# EAGLE board piezo-preamp-tickler_V0-9a (EAGLE 7.5.0)
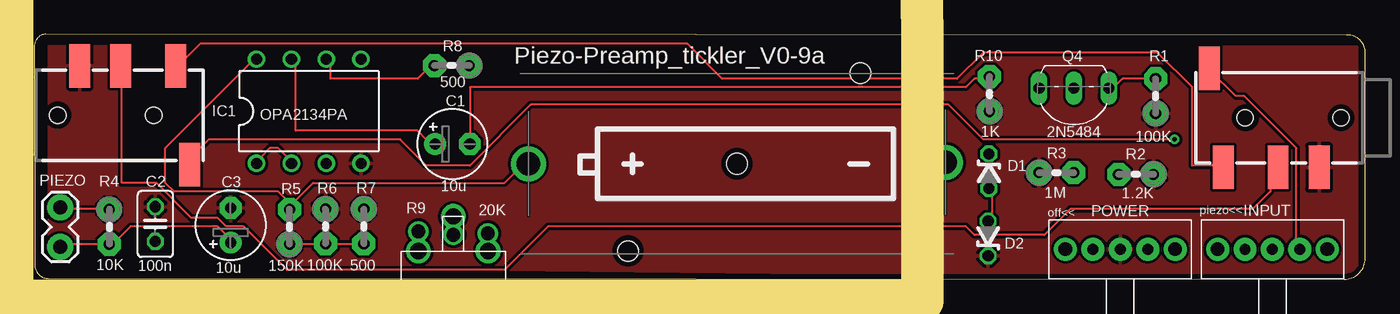
[diagram p0: board, top side]
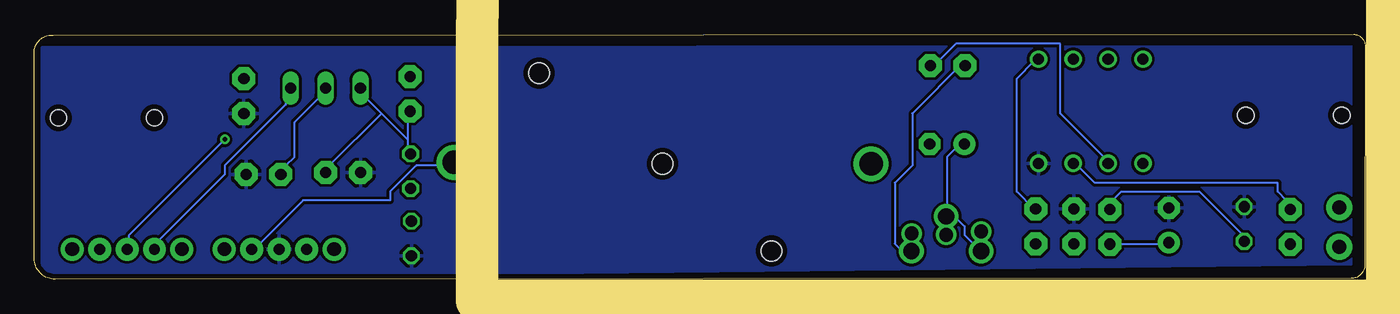
[diagram p1: board, bottom side, seen from below]

Size 97.13 x 17.91 mm. Coordinates in mm from the lower left corner, seen from the top.
Outline: 95.73,17.85 0.84,17.91 arc90 0,16.97 0.04,1.06 arc90 1.04,0.06 95.59,0 arc90 97.13,1.54 97.13,16.65 arc90 95.73,17.85
Copper layers (1*16): Top 0.0356mm / dielectric 1.5011mm / Bottom 0.0356mm
Design rules "oshpark-2layer": minimum track width 6mil, minimum drill 13mil, track to track 6mil, track to pad 6mil, pad to pad 6mil, via to via 6mil, smd to smd 6mil, copper to edge 15mil, drill to drill 6mil, minimum pad ring 7mil, minimum via ring 7mil, stop-mask expansion 2.5mil, vias tented up to drill 0mil, thermal gap 10mil
Net classes: 0 default: width 0.152 mm, clearance 0.2 mm
Holes 1.5 mm at 43.33,2.06 60.3,15.08
Milling: 4 lines

## Footprints (pad centres in the part's own frame; a part is rotated, then mirrored left to right if it is on the bottom)
BATTERY-A23 = drill 1.702: GND@1 15.22,0.1; PWR@1 -15.22,0 | hole 1.524: 0,0
E2,5-5 = drill 0.813 pad 1.6: + -1.27,0 | drill 0.813 pad 1.6 octagon: - 1.27,0
C025-025X050 = drill 0.813 octagon: 1 -1.27,0; 2 1.27,0
ZDIO-2.5 = drill 0.813 octagon: A 1.27,0; C -1.27,0
DIL08 = drill 0.813 pad 1.27: 1 -3.81,-3.81; 2 -1.27,-3.81; 3 1.27,-3.81; 4 3.81,-3.81; 5 3.81,3.81; 6 1.27,3.81; 7 -1.27,3.81; 8 -3.81,3.81
SPDT-SWITCH = drill 0.8 pad 1.676: 1 2,0; 2 4,0; 3 6,0 | drill 1 pad 1.676: P$1 0,0; P$2 8,0
1X02_LOCK = drill 1.016 pad 1.88: 1 -0.178,0; 2 2.718,0
TO92- = drill 0.813 long: 1 2.54,0; 2 0,0; 3 -2.54,0
0204V = drill 0.813 pad 1.676 octagon: 1 -1.27,0; 2 1.27,0
BOURNS-TRIMPOT-3309W1 = drill 1.2: P$1 0,0; P$2 2.54,2.54; P$3 5.08,0
AUDIO-JACK-TRRS-SMD = smd 1.524 x 3.175: EARTH 11.227,-3.619; RING1 6.2,3.619; RING2 3.2,3.619; TIP 10.2,3.619 | hole 1.2: 1.6,0; 8.6,0

## Placement (x,y rotation side)
BAT1  [BATTERY-A23]  51.28,8.45 0 top
C1  10u  [E2,5-5]  30.52,9.88 0 top
C2  100n  [C025-025X050]  8.84,4.04 270 top
C3  10u  [E2,5-5]  14.34,3.96 90 top
D1  BB112  [ZDIO-2.5]  69.67,7.9 270 top
D2  BB112  [ZDIO-2.5]  69.61,2.98 90 top
IC1  OPA2134PA  [DIL08]  20.04,12.28 0 top
INPUT  [SPDT-SWITCH]  86.36,2.21 0 top
ON/OFF  labl  [SPDT-SWITCH]  75.25,2.21 0 top
PIEZO  [1X02_LOCK]  1.89,5.08 270 top
Q4  2N5484  [TO92-]  75.87,13.97 180 top
R1  100K  [0204V]  81.83,13.39 90 top
R2  1.2K  [0204V]  80.4,7.67 180 top
R3  1M  [0204V]  74.59,7.8 0 top
R4  10K  [0204V]  5.47,3.84 270 top
R5  150K  [0204V]  18.63,3.84 90 top
R6  100K  [0204V]  21.26,3.87 270 top
R7  500  [0204V]  24.05,3.87 270 top
R8  500  [0204V]  30.47,15.62 180 top
R9  20K  [BOURNS-TRIMPOT-3309W1]  28.04,2.06 0 top
R10  1K  [0204V]  69.71,13.55 90 top
TO-HEADSET  AUDIO-JACK3LGPADS  [AUDIO-JACK-TRRS-SMD]  96.96,11.8 180 top
TO-PHONE  AUDIO-JACK3LGPADS  [AUDIO-JACK-TRRS-SMD]  0.12,11.99 0 top

## Library data of the parts
BAT1 INPUT ON/OFF TO-HEADSET TO-PHONE = Daniel
C1-C3 = rcl
D1 D2 = diode
IC1 = linear
PIEZO = SparkFun-Connectors
Q4 = transistor-fet
R1-R8 R10 = CMU-ArtFab
R9 = CMU-ArtFab; R9: R9; THIS: 20K

## Nets
`DEL: INPUT.1 Q4.3 R1.2
GND: C2.1 C3.- D2.C IC1.4 ON/OFF.2 R1.1 R2.1 R3.1 R6.1 TO-HEADSET.RING2 TO-PHONE.RING2
N$1: D1.A D2.A
N$2: BAT1.GND@1 ON/OFF.3
N$3: Q4.2 R2.2
N$5: IC1.5 R7.1
N$6: C1.+ IC1.7 R9.P$1 R9.P$2
N$7: IC1.6 R8.2 R9.P$3
N$8: C3.+ PIEZO.2 R4.2 R5.1 R6.2 R7.2
N$9: IC1.3 PIEZO.1 R4.1
N$10: D1.C Q4.1 R3.2 R10.1
N$11: C1.- R10.2
N$12: INPUT.3 TO-HEADSET.EARTH
N$13: TO-HEADSET.TIP TO-PHONE.TIP
N$14: IC1.1 IC1.2 R8.1
N$15: TO-HEADSET.RING1 TO-PHONE.RING1
TO-PHONE: INPUT.2 TO-PHONE.EARTH
V9V: BAT1.PWR@1 C2.2 IC1.8 R5.2

## Tracks (layer width: path | path; a pad name or v marks a point on that pad's centre or on a via)
`DEL
  Top 0.152: Q4.3 78.78,14.03 79.41,14.67 81.32,14.67 R1.2
  Bottom 0.152: INPUT.1 88.3,2.6 83.22,7.68 83.22,8.32 78.78,12.76 78.78,13.4 Q4.3
GND
  pour Bottom: 96.59,17 1.04,17.06 1.04,1.06 96.59,0
  pour Top: 96.59,0 96.59,17 1.04,17.06 1.04,1.06
N$1
  Top 0.152: D2.A 69.89,4.5 69.89,6.41 D1.A
N$2
  Bottom 0.152: ON/OFF.3 80.68,2.6 77.51,5.77 71.16,5.77 71.16,6.41 69.25,8.32 66.71,8.32 BAT1.GND@1
N$3
  Bottom 0.152: Q4.2 76.24,13.4 78.14,11.49 78.14,8.95 78.78,8.32 78.78,7.68 R2.2
N$5
  Bottom 0.152: IC1.5 24.17,15.94 25.44,14.67 25.44,6.41 24.17,5.14 R7.1
N$6
  Top 0.152: IC1.7 19.09,15.94 19.09,10.86 27.98,10.86 28.61,10.22 29.25,10.22 C1.+
  Bottom 0.152: 30.52,5.14 29.25,3.87 29.25,3.23 28.61,2.6 R9.P$1 | 30.52,5.14 30.52,8.95 29.25,10.22 C1.+ | 30.52,5.14 R9.P$2
N$7
  Top 0.152: IC1.6 21.63,15.94 21.63,14.67 27.98,14.67 28.61,15.3 R8.2
  Bottom 0.152: R9.P$3 33.69,1.97 34.33,2.6 34.33,7.04 33.06,8.32 33.06,12.12 29.25,15.94 R8.2
N$8
  Top 0.152: PIEZO.2 1.94,2.6 5.12,2.6 R4.2 5.75,2.6 7.02,3.87 13.37,3.87 14.01,3.23 C3.+ | R5.1 19.09,2.6 20.99,2.6 R6.2 21.63,2.6 R7.2
  Bottom 0.152: C3.+ 14.64,2.6 18.45,2.6 R5.1
N$9
  Top 0.152: PIEZO.1 1.94,5.14 5.12,5.14 R4.1
  Bottom 0.152: IC1.3 20.99,8.32 19.72,7.04 6.39,7.04 6.39,6.41 5.75,5.77 5.75,5.14 R4.1
N$10
  Bottom 0.152: 69.89,10.22 69.89,12.12 R10.1 | 69.89,10.22 69.89,9.59 D1.C | 69.89,10.22 71.79,12.12 | 71.79,12.12 73.06,13.4 Q4.1 | 71.79,12.12 75.6,8.32 R3.2
N$11
  Top 0.152: C1.- 31.79,14.03 67.98,14.03 68.62,14.67 69.25,14.67 R10.2
N$12
  Top 0.152: TO-HEADSET.EARTH 85.76,15.3 87.67,13.4 88.3,13.4 92.11,9.59 92.11,2.6 INPUT.3
N$13
  Top 0.152: TO-PHONE.TIP 10.83,15.94 12.1,17.2 47.66,17.2 50.2,14.67 67.35,14.67 69.25,16.57 81.95,16.57 84.49,14.03 84.49,8.32 86.4,8.32 TO-HEADSET.TIP
N$14
  Top 0.152: IC1.1 16.55,8.95 17.18,9.59 17.82,9.59 18.45,8.95 IC1.2
  Bottom 0.152: R8.1 31.15,15.94 29.88,17.2 22.26,17.2 22.26,12.12 19.09,8.95 IC1.2
N$15
  Top 0.152: TO-PHONE.RING1 6.39,15.3 6.39,7.04 8.93,7.04 11.47,4.5 13.37,4.5 14.01,3.87 15.28,3.87 18.45,0.7 34.33,0.7 37.5,3.87 67.98,3.87 68.62,3.23 73.7,3.23 75.6,5.14 88.94,5.14 90.21,6.41 90.21,7.68 TO-HEADSET.RING1
N$16  (via drill 1 pad 1.42)
  other vias: 28.04,3.5
N$17  (via drill 1 pad 1.42)
  other vias: 30.59,3.25
N$18  (via drill 1 pad 1.42)
  other vias: 33.1,3.35
TO-PHONE  (via drill 0.33)
  Top 0.152: v83.22,10.22 69.25,10.22 66.71,12.76 36.23,12.76 31.79,8.32 28.61,8.32 26.71,10.22 12.74,10.22 11.47,8.95 TO-PHONE.EARTH
  Bottom 0.152: v83.22,10.22 90.21,3.23 90.21,2.6 INPUT.2
V9V
  Top 0.152: 18.45,5.77 19.09,5.14 R5.2 18.45,5.77 | 18.45,5.77 17.82,6.41 10.2,6.41 9.56,7.04 9.56,9.59 15.91,15.94 IC1.8 | 18.45,5.77 19.09,5.77 20.36,7.04 34.33,7.04 35.6,8.32 BAT1.PWR@1
  Bottom 0.152: C2.2 8.93,3.23 12.1,6.41 17.82,6.41 18.45,5.77 18.45,5.14 R5.2

## Text on the board
tNames: Piezo-Preamp_tickler_V0-9a | off<< | POWER | piezo<<